# Altium PCB board.PcbDoc
Units mil, origin at the board's own origin, x right, y up, seen from the top; angles counter-clockwise.
Board outline 3848.43 x 2391.73 mil, 2 copper layers (Top Layer, Top, Bottom Layer, Bottom); 14 components, 10 nets, 36 pads, 1 vias.
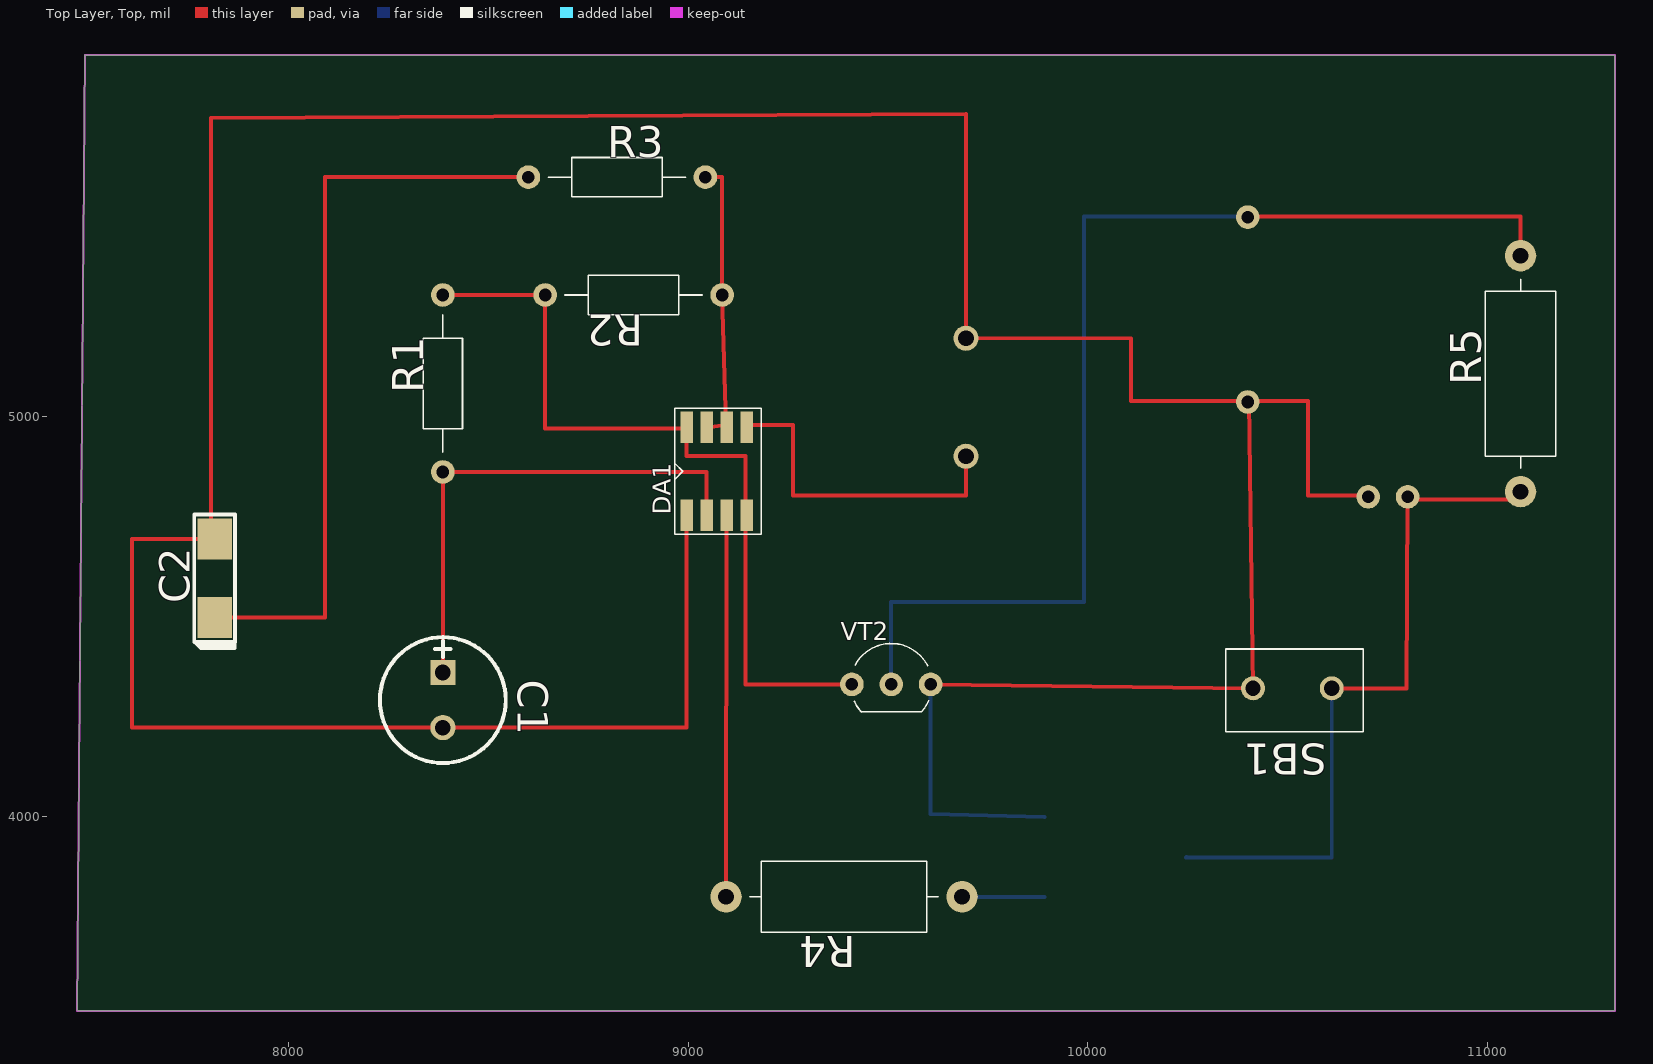
[diagram p0: Top Layer, Top view]
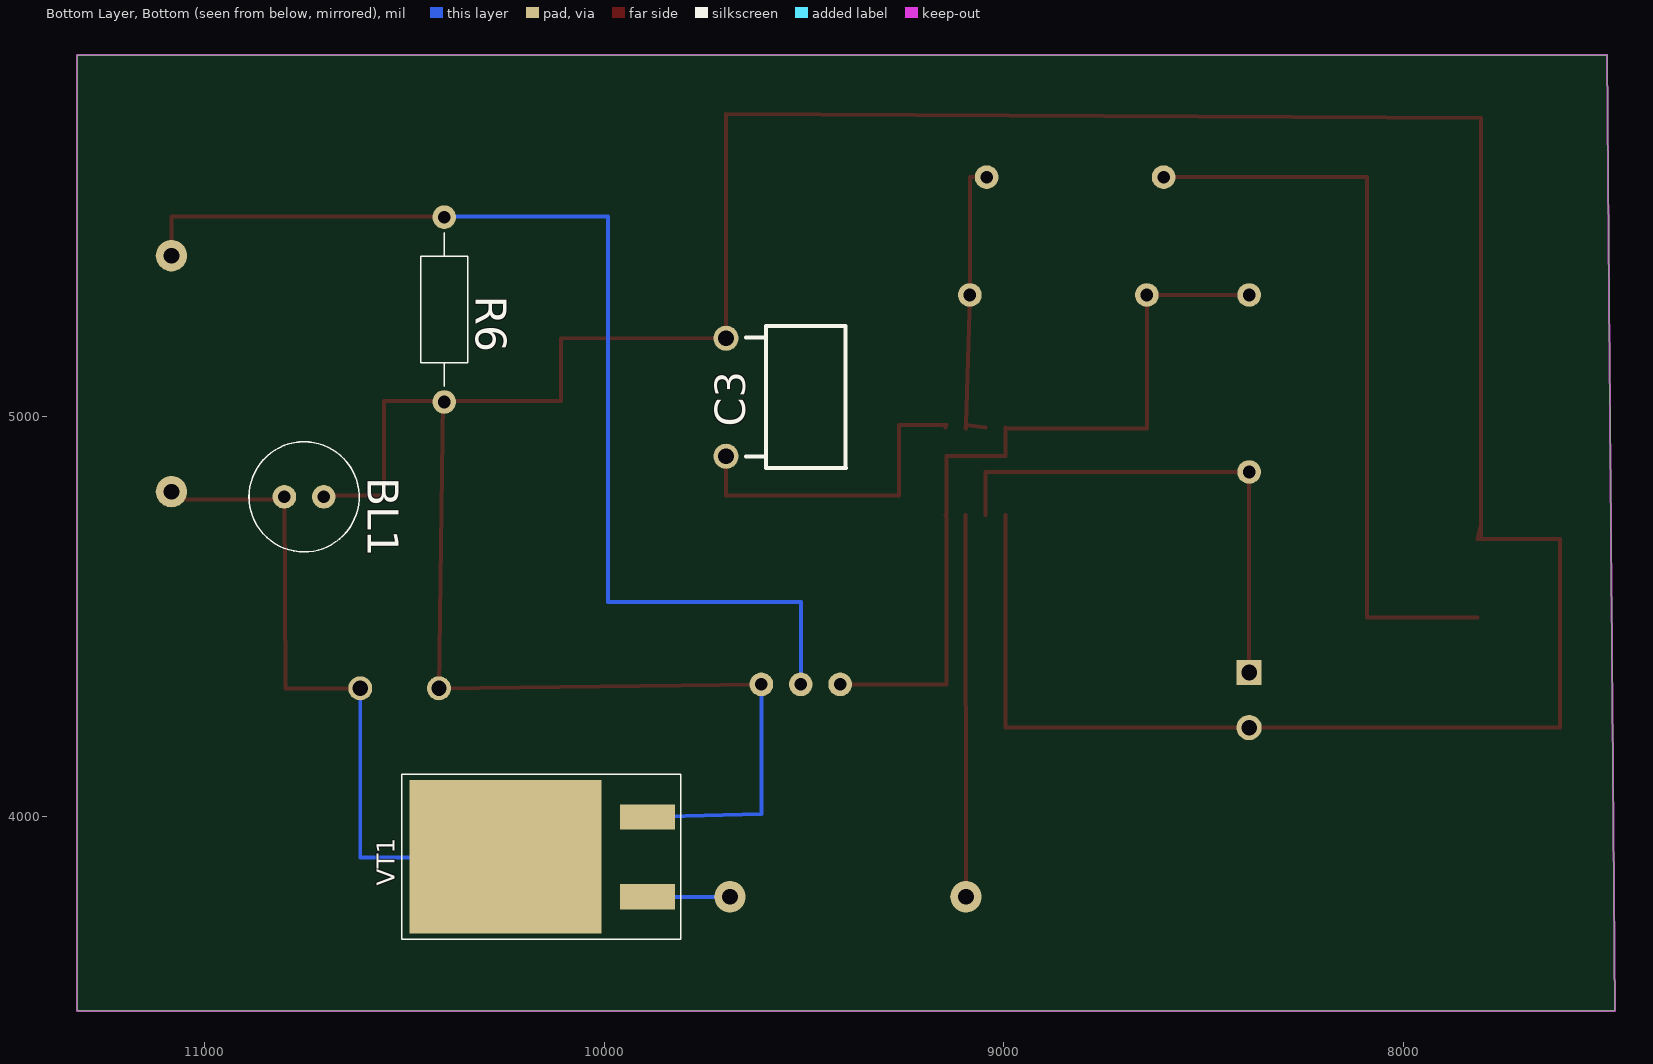
[diagram p1: Bottom Layer, Bottom view, seen from below]

## Layer stack, top to bottom
Top Solder, Top Mask: solder mask 0.4, Solder Resist, Dk 3.5
Top Layer, Top: signal copper 1.4
Dielectric 1: dielectric 12.6, FR-4, Dk 4.8
Bottom Layer, Bottom: signal copper 1.4
Bottom Solder, Bot Mask: solder mask 0.4, Solder Resist, Dk 3.5

## Board outline
7470.47,3513.78 11318.9,3513.78 11318.9,5905.51 7490.16,5905.51

## Design rules (kind name [scope] priority, off if disabled: settings)
Clearance [All] p1: gap=10 ignorepadtopadclearanceinfootprint=FALSE except(0: Arc-Hole Track-Hole SMDPad-Hole THPad-Hole Via-Hole Fill-Hole Poly-Hole Region-Hole Text-Hole; 11.81: Arc-Arc Arc-Track Arc-THPad Arc-Via Track-Track Track-THPad Track-Via THPad-THPad THPad-Via Via-Via)
PlaneClearance [All] p1: clearance=10
PolygonConnect [All] p1: connectstyle=Relief reliefconductorwidth=10 reliefentries=4 polygonreliefangle="90 Angle" airgapwidth=10
RoutingVias [All] p1: holewidth=28 width=50 viastyle="Through Hole" minholewidth=28 minwidth=50 maxholewidth=28 maxwidth=50
SolderMaskExpansion [All] p1: expansion=4 istentingtop=FALSE
Width [All] p1: maxlimit=10 minlimit=10 preferedwidth=10
29 further rules are at their usual default settings.

## Components (designator, comment, footprint, x,y, rotation, side; value= is the part's Value field where it differs from the comment)
BL1 "{Value}" HL_MINI 10800,4800 r270 bottom
C1 "5mk" ECR-8 8385.83,4360.24 r270 top
C2 "220mk" CE6032_C 7814.96,4596.46 r90 top
C3 "0,01" 1017-B3R 9694.88,4901.57 r90 bottom
DA1 "" SO-8 8996.06,4753.94 r90 top
R1 "10k" C2-33H-0.125W 8385.83,4862.2 r90 top
R2 "10M" C2-33H-0.125W 9084.65,5305.12 r180 top
R3 "1k" C2-33H-0.125W 8600,5600 r0 top
R4 "100" C2-33H-0.5W_15MM 9685.04,3799.21 r180 top
R5 "3.3k" C2-33H-0.5W_15MM 11082.68,4812.99 r90 top
R6 "1k" C2-33H-0.25W 10400,5500 r270 bottom
SB1 "" 8AS9M2RE 10610.24,4320.87 r180 top
VT1 "BUZ11" D2PAK 9891.73,3799.21 r90 bottom
VT2 "KT3107" "KT26-1 (2002)" 9507.87,4330.71 r0 top

## Footprints (in the part's own frame and the unit in brackets; to place one, negate y for a bottom-side part, rotate by r counter-clockwise, add the part's x,y. Pads: shape width x height; smd on the part's side, far side on the other; paste and mask are expansions set on the pad)
8AS9M2RE [mil]
  round 60 hole 38: 1(0,0) 2(196.85,0)
  silkscreen extent -79,-98 266,108
1017-B3R [mm]
  round 1.6 hole 1: 1(0,0) 2(7.5,0)
  silkscreen extent -0.76,-7.61 8.26,-1.25
C2-33H-0.5W_15MM [mm]
  round 2 hole 1: 1(0,0) 2(15,0)
  silkscreen extent 1.5,-2.25 13.5,2.25
C2-33H-0.25W [mm]
  round 1.5 hole 0.8: 1(0,0) 2(11.75,0)
  silkscreen extent 1,-1.5 10.75,1.5
C2-33H-0.125W [mm]
  round 1.5 hole 0.8: 1(0,0) 2(11.25,0)
  silkscreen extent 1.25,-1.25 10,1.25
CE6032_C [mm]
  rect 2.6x2.2 smd: 1(-2.5,0) 2(2.5,0)
  silkscreen extent -4.44,-1.3 4.05,1.3
D2PAK [mm]
  rect 1.6x3.5 smd: 1(0,0) 3(5.08,0)
  rect 9.75x12.2 smd: 2(2.54,9.017)
  silkscreen extent -2.71,-2.13 7.79,15.62
ECR-8 [mm]
  rect 1.6x1.6 hole 1: 1(0,0)
  round 1.6 hole 1: 2(3.5,0)
  silkscreen extent -2.25,-4 5.75,4
HL_MINI [mm]
  round 1.5 hole 0.8: 1(0,0) 2(0,2.5)
  silkscreen extent -3.5,-2.25 3.5,4.75
"KT26-1 (2002)" [mm]
  round 1.5 hole 0.8: 1(-2.5,0) 2(0,0) 3(2.5,0)
  silkscreen extent -2.33,-1.76 2.38,2.6
SO-8 [mm]
  rect 2x0.8 smd: 1(0,0) 2(0,-1.27) 3(0,-2.54) 4(0,-3.81) 5(5.588,-3.81) 6(5.588,-2.54) 7(5.588,-1.27) 8(5.588,0)
  silkscreen extent -1.21,-4.75 6.79,0.75

## Via types
v1: diameter 40, hole 18, Top Layer, Top to Bottom Layer, Bottom, 1 vias

## Nets (pads, with @x,y where several pads share a name; then routed paths per layer and width w, separated by ;. In a path a pad name is that pad's centre, name@x,y a point inside that pad or via, vN(x,y) a via of type N, cw(c..) or ccw(c..) an arc to the next point about the centre after c; other vN are vias at no path point)
+5B: BL1.2 C1.2 C2.2 C3.2 DA1.1 R6.2 SB1.2 VT1.3 VT2.3 | length 9691.5
  Top Layer, Top w10: DA1.1 8996.06,4222.44 C1.2 7608.27,4222.44 7608.27,4694.88 C2.2@7805.12,4694.88 ; VT2.3 SB1.2 R6.2@10403.54,5039.37 ; BL1.2 10698.82,4803.15 10551.18,4803.15 10551.18,5039.37 R6.2@10403.54,5039.37 ; C2.2@7805.12,4694.88 C2.2 C2.2@7805.12,4734.25 ; C2.2@7805.12,4694.88 C2.2@7805.12,4734.25 ; C2.2@7805.12,4734.25 7805.12,5748.03 9694.88,5757.87 C3.2 10108.27,5196.85 10108.27,5039.37 R6.2@10393.7,5039.37 ; R6.2@10393.7,5039.37 R6.2@10403.54,5039.37 ; R6.2@10393.7,5039.37 R6.2 R6.2@10403.54,5039.37
  Bottom Layer, Bottom w10: VT2.3 9606.3,4005.91 VT1.3
NET00001: C3.1 DA1.5 | length 833.6
  Top Layer, Top w10: DA1.5 9143.7,4980.31 9261.81,4980.31 9261.81,4803.15 9694.88,4803.15 C3.1
NET00002: R4.1 VT1.1 | length 206.7
  Bottom Layer, Bottom w10: R4.1 VT1.1
NET00003: BL1.1 R5.1 SB1.1 VT1.2 | length 1760.3
  Top Layer, Top w10: SB1.1 10797.24,4320.87 BL1.1 10807.09,4793.31 11082.68,4793.31 R5.1
  Bottom Layer, Bottom w10: VT1.2 10246.06,3897.64 10610.24,3897.64 SB1.1
NET00005: R5.2 R6.1 VT2.2 | length 2852.6
  Top Layer, Top w10: R6.1 v1(10403.54,5501.97) 11082.68,5501.97 R5.2
  Bottom Layer, Bottom w10: VT2.2 9507.87,4537.4 9990.16,4537.4 9990.16,5501.97 v1(10403.54,5501.97) R6.1
NET00007: DA1.4 DA1.8 R1.2 R2.2 VT2.1 | length 2003.9
  Top Layer, Top w10: R1.2 R2.2 8641.73,4970.47 DA1.8@8996.06,4970.47 ; DA1.8 DA1.8@8996.06,4970.47 ; DA1.4 DA1.4@9143.7,4753.94 ; VT2.1 9143.7,4330.71 DA1.4@9143.7,4753.94 ; DA1.8@8996.06,4970.47 8996.06,4901.57 9143.7,4901.57 DA1.4@9143.7,4753.94
NET00009: C2.1 R3.1 | length 1892.2
  Top Layer, Top w10: C2.1 8090.55,4498.03 8090.55,5600.39 8602.36,5600.39 R3.1
NET00010: DA1.6 DA1.7 R2.1 R3.2 | length 731
  Top Layer, Top w10: R3.2 9045.28,5600.39 9084.65,5600.39 R2.1 DA1.6@9094.2,4980.28 ; DA1.7 DA1.6@9094.2,4980.28 ; DA1.6@9094.2,4980.28 9094.49,4980.31 DA1.6 9094.49,4970.47 DA1.6@9094.2,4980.28
NET00011: C1.1 DA1.2 R1.1 | length 1270.5
  Top Layer, Top w10: C1.1 8385.83,4370.08 R1.1 9045.28,4862.2 9045.28,4753.94 DA1.2
NET00013: DA1.3 R4.2 | length 954.7
  Top Layer, Top w10: R4.2 DA1.3

## Keep-outs
Keep-Out Layer, Board:
  the board outline again, w5